# Altium PCB PCB.PcbDoc (part 4 of 6)
Units mm, origin at the board's own origin, x right, y up, seen from the top; angles counter-clockwise.
Board outline 190 x 64 mm, 6 copper layers (SIG 1, GND 1, SIG 2, PWR, GND 2, SIG 3), stack 1.565 mm thick; 489 components, 387 nets, 1828 pads, 1817 vias.
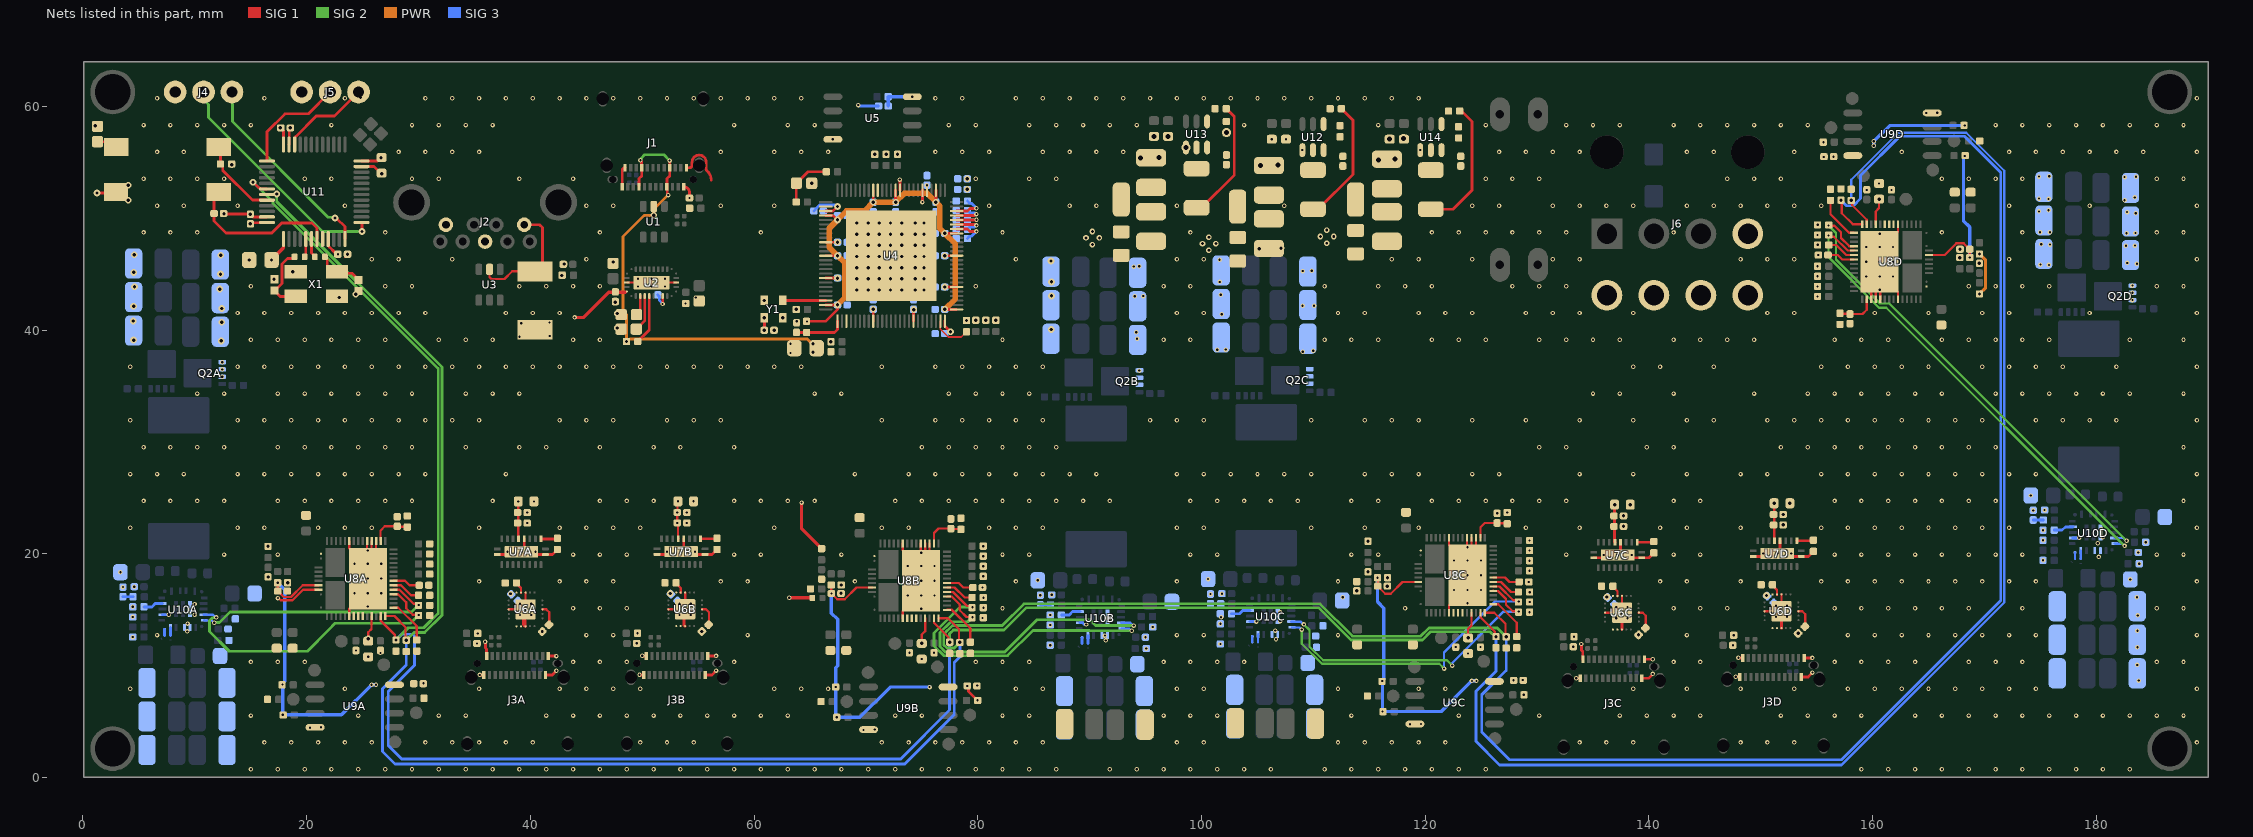
[diagram p8: the nets of this part, all layers, seen from the top]

## Via types
v1: diameter 0.4, hole 0.2, SIG 1 to SIG 3, tented both sides, 1364 vias
v2: diameter 0.6, hole 0.3, SIG 1 to SIG 3, tented both sides, 196 vias
v3: diameter 0.5, hole 0.2, SIG 1 to SIG 3, 130 vias
v4: diameter 0.8, hole 0.45, SIG 1 to SIG 3, tented both sides, 102 vias
v5: diameter 0.5, hole 0.25, SIG 1 to SIG 3, tented both sides, 14 vias
v6: diameter 0.5, hole 0.3, SIG 1 to SIG 3, tented both sides, 5 vias
v7: diameter 0.55, hole 0.3, SIG 1 to SIG 3, tented both sides, 4 vias
v8: diameter 0.55, hole 0.35, SIG 1 to SIG 3, tented both sides, 2 vias

## Nets (pads, with @x,y where several pads share a name; then routed paths per layer and width w, separated by ;. In a path a pad name is that pad's centre, name@x,y a point inside that pad or via, vN(x,y) a via of type N, cw(c..) or ccw(c..) an arc to the next point about the centre after c; other vN are vias at no path point) (continued)
GND: C1.1 C2.1 C7.1 C8.2 C9.2 C10.1 C11.1 C12.1 C13.1 C14.1 C15.1 C16.1 C17.1 C18.1 C19.2 C20.1 C21.1 C22.1 C23.1 C24.1 C25.1 C26.1 C27.1 C28.2 C29.2 C30.1 C31.2 C32A.1 C32B.1 C32C.1 C32D.1 C33A.2 C33B.2 C33C.2 C33D.2 C38A.1 C38B.1 C38C.1 C38D.1 C39A.2 C39B.2 C39C.2 C39D.2 C40A.2 C40B.2 C40C.2 C40D.2 C41A.2 C41B.2 C41C.2 C41D.2 C42A.2 C42B.2 C42C.2 C42D.2 C43A.2 C43B.2 C43C.2 C43D.2 C44A.2 C44B.2 C44C.2 C44D.2 C45A.2 C45B.2 C45C.2 C45D.2 C46A.2 C46B.2 C46C.2 C46D.2 C47A.2 C47B.2 C47C.2 C47D.2 C48A.2 C48B.2 C48C.2 C48D.2 C49A.2 C49B.2 C49C.2 C49D.2 C50A.2 C50B.2 C50C.2 C50D.2 C51A.2 C51B.2 C51C.2 C51D.2 C52A.2 C52B.2 C52C.2 C52D.2 C53A.2 C53B.2 C53C.2 C53D.2 C54A.2 C54B.2 C54C.2 C54D.2 C55A.2 C55B.2 C55C.2 C55D.2 C56A.2 C56B.2 C56C.2 C56D.2 C57A.2 C57B.2 C57C.2 C57D.2 C58A.2 C58B.2 C58C.2 C58D.2 C59A.2 C59B.2 C59C.2 C59D.2 C62A.2 C62B.2 C62C.2 C62D.2 C63A.2 C63B.2 C63C.2 C63D.2 C64A.2 C64B.2 C64C.2 C64D.2 C65A.2 C65B.2 C65C.2 C65D.2 C66A.2 C66B.2 C66C.2 C66D.2 C67A.2 C67B.2 C67C.2 C67D.2 C68A.2 C68B.2 C68C.2 C68D.2 C69A.2 C69B.2 C69C.2 C69D.2 C70A.2 C70B.2 C70C.2 C70D.2 C71A.2 C71B.2 C71C.2 C71D.2 C72A.2 C72B.2 C72C.2 C72D.2 C73.2 C74.2 C75.2 C76.2 C77.2 C78.1 C80.1 C81.1 C83.2 C84.2 C85.2 C86.2 C88.2 C89.2 C90.2 C91.2 C93.2 C94.2 C95.2 C96.2 J1.A1 J1.A12 J1.B1 J1.B12 J2.4 J2.7 J3A.A1 J3A.A12 J3A.B1 J3A.B12 J3B.A1 J3B.A12 J3B.B1 J3B.B12 J3C.A1 J3C.A12 J3C.B1 J3C.B12 J3D.A1 J3D.A12 J3D.B1 J3D.B12 J4.1 J5.1 J6.4 J6.5 J6.6 J6.7 J6.8 Q2A.1 Q2A.2 Q2A.3 Q2B.1 Q2B.2 Q2B.3 Q2C.1 Q2C.2 Q2C.3 Q2D.1 Q2D.2 Q2D.3 R3.2 R4.2 R5.2 R6.2 R7.2 R10.1 R12.1 R14.1 R16.1 R17.2 R18.1 R19.2 R22.2 R23.2 R28.2 R29.2 R32.2 R33.2 R34.2 R36A.2 R36B.2 R36C.2 R36D.2 R37A.1 R37B.1 R37C.1 R37D.1 R45A.2 R45B.2 R45C.2 R45D.2 R46A.2 R46B.2 R46C.2 R46D.2 R47A.2 R47B.2 R47C.2 R47D.2 R48A.2 R48B.2 R48C.2 R48D.2 R50A.2 R50B.2 R50C.2 R50D.2 R51A.2 R51B.2 R51C.2 R51D.2 R59A.2 R59B.2 R59C.2 R59D.2 R62A.2 R62B.2 R62C.2 R62D.2 R63A.2 R63B.2 R63C.2 R63D.2 R64A.2 R64B.2 R64C.2 R64D.2 R66A.2 R66B.2 R66C.2 R66D.2 R71.2 R74.2 R77.2 R78.1 SW2.2 U2.13 U2.28 U2.31 U4.101 U5.4 U6A.8 U6A.13 U6A.16 U6A.17 U6A.18 U6A.21 U6B.8 U6B.13 U6B.16 U6B.17 U6B.18 U6B.21 U6C.8 U6C.13 U6C.16 U6C.17 U6C.18 U6C.21 U6D.8 U6D.13 U6D.16 U6D.17 U6D.18 U6D.21 U7A.5 U7A.11 U7A.20 U7A.21 U7B.5 U7B.11 U7B.20 U7B.21 U7C.5 U7C.11 U7C.20 U7C.21 U7D.5 U7D.11 U7D.20 U7D.21 U8A.1-2 U8A.20 U8A.45 U8A.46 U8A.47 U8A.51 U8A.59 U8B.1-2 U8B.20 U8B.45 U8B.46 U8B.47 U8B.51 U8B.59 U8C.1-2 U8C.20 U8C.45 U8C.46 U8C.47 U8C.51 U8C.59 U8D.1-2 U8D.20 U8D.45 U8D.46 U8D.47 U8D.51 U8D.59 U9A.4 U9B.4 U9C.4 U9D.4 U10A.9 U10A.10 U10A.15 U10A.24 U10B.9 U10B.10 U10B.15 U10B.24 U10C.9 U10C.10 U10C.15 U10C.24 U10D.9 U10D.10 U10D.15 U10D.24 U11.8 U11.23 U11.35 U11.47 U12.4 U13.4 U14.4 X1.2 X1.4 Y1.2 | length 150.4
  SIG 1 w0.203: U8A.20@23.8,14.45 23.8,15.1 25.45,16.75 U8A.59@25.45,17.8 ; U8A.51@23.8,21.15 23.8,20.5 25.45,18.85 U8A.59@25.45,17.8 ; U8A.59@25.4,19.12 U8A.47@25.4,21.15 ; U8A.46@25.8,21.15 U8A.59@25.8,18.15 ; U8A.45@26.2,21.15 26.2,18.55 U8A.59@25.8,18.15 ; U6A.13@38.062,15.044 v3(39.572,15.044) U6A.8@39.572,16.554 ; U2.28@48.636,44.269 U2.31@50.836,44.269 U2.13@53.036,44.269 ; U6B.13@52.337,15.052 v3(53.847,15.052) U6B.8@53.847,16.563 ; U8B.20@73.3,14.25 73.3,14.9 74.95,16.55 v3(74.95,17.6) ; U8B.51@73.3,20.95 73.3,20.3 74.95,18.65 v3(74.95,17.6) ; U8B.59@74.9,18.92 U8B.47@74.9,20.95 ; U8B.46@75.3,20.95 U8B.59@75.3,17.95 ; U8B.45@75.7,20.95 75.7,18.35 U8B.59@75.3,17.95 ; U8C.20@122.15,14.75 122.15,15.4 123.8,17.05 v3(123.8,18.1) ; U8C.51@122.15,21.45 122.15,20.8 123.8,19.15 v3(123.8,18.1) ; U8C.59@123.75,19.42 U8C.47@123.75,21.45 ; U8C.46@124.15,21.45 U8C.59@124.15,18.45 ; U8C.45@124.55,21.45 124.55,18.85 U8C.59@124.15,18.45 ; U6C.13@136.092,14.749 v3(137.602,14.749) U6C.8@137.602,16.26 ; U6D.13@150.362,14.878 151.872,14.878 U6D.8@151.872,16.388 ; U8D.45@159.9,42.775 159.9,45.375 U8D.59@160.3,45.775 ; U8D.46@160.3,42.775 U8D.59@160.3,45.775 ; U8D.47@160.7,42.775 U8D.59@160.7,44.805 ; U8D.51@162.3,42.775 162.3,43.425 160.65,45.075 v3(160.65,46.125) ; U8D.20@162.3,49.475 162.3,48.825 160.65,47.175 v3(160.65,46.125) ; U8A.59@25.45,17.8 U8A.59@25.8,18.15 ; v3(74.95,17.6) U8B.59@75.3,17.95 ; v3(123.8,18.1) U8C.59@124.15,18.45 ; U8D.59@160.3,45.775 v3(160.65,46.125)
  SIG 1 w0.25: v2(1.252,52.278) 2.874,52.278 SW2.2@2.95,52.355 ; C78.1@12.578,50.443 v2(12.611,50.411) 14.936,50.411 15.208,50.139 U11.47@16.45,50.139 ; U11.35@18.425,56.614 18.435,56.624 18.435,58.011 v2(18.525,58.102) ; C73.2@23.462,46.582 23.462,46.608 v2(23.655,46.8) ; U11.23@24.9,54.639 26.031,54.639 26.622,54.049 C76.2@26.704,54.049 ; v1@35.54,9.195 35.555,9.181 35.844,9.181 J3A.B12@35.85,9.175 ; v1(35.95,12.15) 35.979,12.121 35.979,11.581 36.075,11.484 J3A.A1@36.075,10.87 ; U7A.11@37.05,19.95 38.95,19.95 v3(39.2,20.2) ; U7A.5@39.45,21.35 39.45,20.45 v3(39.2,20.2) ; U6A.18@39.55,13.6 39.55,13.975 ccw(c39.4,13.975) 39.4,14.125 39.4,13.706 ccw(c39.572,13.706) U6A.18@39.572,13.534 ; J3A.B1@41.35,9.175 41.958,9.175 v1@42.348,9.565 ; J3A.A12@41.6,10.875 v1(42.335,10.875) ; R37A.1@42.425,20.4 41.975,19.95 U7A.20@41.35,19.95 39.45,19.95 v3(39.2,20.2) ; J1.A12@48.213,52.833 48.213,54.283 cw(c48.463,54.283) J1.B1@48.463,54.533 ; v1@49.815,9.204 49.83,9.189 50.119,9.189 J3B.B12@50.125,9.183 ; v1(49.999,10.903) 50.023,10.878 J3B.A1@50.33,10.878 ; U7B.11@51.325,19.958 53.225,19.958 v3(53.475,20.208) ; J1.A1@53.713,52.833 cw(c53.713,52.315) 54.231,52.315 v1(54.231,51.833) ; U7B.5@53.725,21.358 53.725,20.458 v3(53.475,20.208) ; 53.75,14.125 53.75,13.639 ccw(c53.847,13.639) U6B.18@53.847,13.542 ; J1.B12@53.963,54.533 54.218,54.533 ccw(c54.218,54.783) 54.468,54.783 54.468,55.043 cw(c55.093,55.043) 55.718,55.043 55.718,54.441 ccw(c55.968,54.441) 55.801,54.255 cw(c55.067,53.425) 56.175,53.425 ; J3B.B1@55.625,9.183 56.233,9.183 v1@56.623,9.573 ; J3B.A12@55.875,10.883 v1(56.61,10.883) ; R37B.1@56.7,20.408 56.25,19.958 U7B.20@55.625,19.958 53.725,19.958 v3(53.475,20.208) ; v1@133.571,8.901 133.586,8.886 133.875,8.886 J3C.B12@133.88,8.88 ; v1(133.975,11.95) 134.004,11.921 134.004,11.381 134.105,11.279 J3C.A1@134.105,10.575 ; U7C.11@135.08,19.655 136.98,19.655 v3(137.23,19.905) ; U7C.5@137.48,21.055 137.48,20.155 v3(137.23,19.905) ; U6C.18@137.602,13.239 v3(137.602,14.749) ; J3C.B1@139.38,8.88 139.988,8.88 v1@140.378,9.27 ; J3C.A12@139.63,10.58 v1(140.365,10.58) ; R37C.1@140.455,20.105 140.005,19.655 U7C.20@139.38,19.655 137.48,19.655 v3(137.23,19.905) ; v1@147.84,9.029 147.855,9.014 148.144,9.014 J3D.B12@148.15,9.008 ; v1(148.024,10.728) 148.048,10.703 J3D.A1@148.355,10.703 ; U7D.11@149.35,19.783 151.25,19.783 v3(151.5,20.033) ; U7D.5@151.75,21.183 151.75,20.283 v3(151.5,20.033) ; U6D.18@151.872,13.367 v3(151.872,14.877) ; J3D.B1@153.65,9.008 154.258,9.008 v1@154.648,9.398 ; J3D.A12@153.9,10.708 v1(154.635,10.708) ; R37D.1@154.725,20.233 154.275,19.783 U7D.20@153.65,19.783 151.75,19.783 v3(151.5,20.033)
  SIG 3 w0.25: U10A.15@7.114,14.572 7.672,14.572 v1(7.675,14.575) ; v1(69.317,60.14) 69.407,60.05 C30.1@71.14,60.05 ; U10B.15@89.144,13.843 89.381,13.843 89.503,13.721 89.676,13.721 v1(89.705,13.693) ; U10C.15@104.363,13.95 104.921,13.95 v1(104.924,13.953) ; U10D.15@177.924,21.428 178.483,21.428 v1(178.485,21.43)
  other v1: 15.019,0.746 17.419,0.746 19.819,0.746 22.219,0.746 24.619,0.746 27.019,0.746 29.419,0.746 31.819,0.746 34.219,0.746 36.619,0.746 39.019,0.746 41.419,0.746 43.819,0.746 46.219,0.746 48.619,0.746 51.019,0.746 53.419,0.746 55.819,0.746 58.219,0.746 60.619,0.746 63.019,0.746 65.419,0.746 67.819,0.746 70.219,0.746 72.619,0.746 75.019,0.746 77.419,0.746 79.819,0.746 82.219,0.746 84.619,0.746 87.019,0.746 91.819,0.746 94.219,0.746 96.619,0.746 99.019,0.746 101.419,0.746 103.819,0.746 106.219,0.746 111.019,0.746 113.419,0.746 115.819,0.746 118.219,0.746 120.619,0.746 123.019,0.746 125.419,0.746 159.019,0.746 161.419,0.746 163.819,0.746 166.219,0.746 168.619,0.746 171.019,0.746 173.419,0.746 175.819,0.746 178.219,0.746 180.619,0.746 183.019,0.746 16.219,3.146 18.619,3.146 21.019,3.146 23.419,3.146 25.819,3.146 30.619,3.146 33.019,3.146 35.419,3.146 37.819,3.146 40.219,3.146 49.819,3.146 52.219,3.146 54.619,3.146 71.419,3.146 73.819,3.146 76.219,3.146 78.619,3.146 81.019,3.146 83.419,3.146 85.819,3.146 97.819,3.146 100.219,3.146 112.219,3.146 114.619,3.146 117.019,3.146 119.419,3.146 121.819,3.146 133.819,3.146 136.219,3.146 138.619,3.146 148.219,3.146 150.619,3.146 153.019,3.146 189.019,3.146 69.796,4.271 70.787,4.297 20.296,4.471 21.287,4.497 118.646,4.771 119.637,4.797 15.019,5.546 24.619,5.546 31.819,5.546 34.219,5.546 41.419,5.546 43.819,5.546 46.219,5.546 48.619,5.546 51.019,5.546 53.419,5.546 55.819,5.546 58.219,5.546 60.619,5.546 63.019,5.546 72.619,5.546 75.019,5.546 82.219,5.546 84.619,5.546 96.619,5.546 99.019,5.546 101.419,5.546 113.419,5.546 123.019,5.546 130.219,5.546 137.419,5.546 139.819,5.546 142.219,5.546 144.619,5.546 151.819,5.546 154.219,5.546 156.619,5.546 159.019,5.546 163.819,5.546 166.219,5.546 168.619,5.546 171.019,5.546 173.419,5.546 175.819,5.546 178.219,5.546 180.619,5.546 183.019,5.546 185.419,5.546 187.819,5.546 4.219,7.946 23.419,7.946 35.419,7.946 42.619,7.946 45.019,7.946 47.419,7.946 49.819,7.946 61.819,7.946 64.219,7.946 66.619,7.946 83.419,7.946 85.819,7.946 97.819,7.946 100.219,7.946 112.219,7.946 119.419,7.946 121.819,7.946 138.619,7.946 143.419,7.946 148.219,7.946 153.019,7.946 157.819,7.946 160.219,7.946 162.619,7.946 165.019,7.946 167.419,7.946 169.819,7.946 172.219,7.946 174.619,7.946 189.019,7.946 79.956,8.234 30.456,8.434 183.825,8.675 128.735,8.734 133.516,8.892 147.786,9.02 35.486,9.186 49.761,9.195 140.365,9.27 154.635,9.398 42.335,9.565 56.61,9.573 183.675,10.075 15.019,10.346 17.419,10.346 19.819,10.346 43.819,10.346 46.219,10.346 48.619,10.346 58.219,10.346 79.819,10.346 82.219,10.346 84.619,10.346 96.619,10.346 99.019,10.346 101.419,10.346 103.819,10.346 142.219,10.346 144.619,10.346 156.619,10.346 159.019,10.346 161.419,10.346 163.819,10.346 168.619,10.346 171.019,10.346 173.419,10.346 185.419,10.346 187.819,10.346 75,10.6 25.5,10.8 123.85,11.1 26.6,11.15 73.9,11.17 76.1,11.17 24.4,11.37 95.081,11.543 122.75,11.67 124.95,11.67 183.7,11.65 133.26,11.705 86.481,11.843 147.53,11.833 101.7,11.95 35.23,12 49.505,12.008 91.455,12.27 106.674,12.378 95,12.553 4.451,12.572 133.33,12.605 91.38,12.705 147.6,12.733 6.619,12.746 45.019,12.746 47.419,12.746 59.419,12.746 97.819,12.746 100.219,12.746 112.219,12.746 143.419,12.746 157.819,12.746 160.219,12.746 162.619,12.746 165.019,12.746 167.419,12.746 169.819,12.746 172.219,12.746 174.619,12.746 189.019,12.746 35.3,12.9 49.575,12.908 9.325,13.075 183.7,13.125 106.599,13.153 95.654,13.467 86.481,13.643 101.7,13.75 9.35,13.775 107.049,14.003 91.83,14.033 101.76,14.35 4.451,14.372 183.725,14.5 91.83,14.538 86.481,14.543 9.975,14.575 107.049,14.775 43.819,15.146 46.219,15.146 48.619,15.146 82.219,15.146 118.219,15.146 142.219,15.146 144.619,15.146 147.019,15.146 156.619,15.146 159.019,15.146 161.419,15.146 163.819,15.146 166.219,15.146 168.619,15.146 173.419,15.146 185.419,15.146 187.819,15.146 4.451,15.272 9.975,15.525 112.652,16.135 183.65,16.125 85.604,16.31 86.621,16.343 100.823,16.417 101.84,16.45 80.43,17 3.574,17.04 4.591,17.072 129.28,17.5 35.419,17.546 42.619,17.546 45.019,17.546 47.419,17.546 57.019,17.546 59.419,17.546 69.019,17.546 83.419,17.546 97.819,17.546 112.219,17.546 141.019,17.546 143.419,17.546 148.219,17.546 155.419,17.546 157.819,17.546 160.219,17.546 162.619,17.546 165.019,17.546 167.419,17.546 169.819,17.546 172.219,17.546 174.619,17.546 189.019,17.546 85.381,17.643 183.061,17.728 100.6,17.75 80.5,18 3.351,18.372 129.35,18.5 80.5,18.9 183.861,19.128 129.35,19.4 175.261,19.428 180.235,19.731 80.5,19.8 12.619,19.946 17.419,19.946 43.819,19.946 46.219,19.946 48.619,19.946 58.219,19.946 60.619,19.946 67.819,19.946 82.219,19.946 84.619,19.946 99.019,19.946 101.419,19.946 113.419,19.946 115.819,19.946 132.619,19.946 142.219,19.946 144.619,19.946 156.619,19.946 159.019,19.946 161.419,19.946 163.819,19.946 166.219,19.946 168.619,19.946 171.019,19.946 173.419,19.946 185.419,19.946 187.819,19.946 183.78,20.138 129.35,20.3 80.5,20.7 180.16,20.95 184.435,21.052 129.35,21.2 175.261,21.228 180.61,21.48 175.261,22.128 180.445,22.215 4.219,22.346 13.819,22.346 16.219,22.346 21.019,22.346 23.419,22.346 25.819,22.346 35.419,22.346 42.619,22.346 45.019,22.346 47.419,22.346 49.819,22.346 61.819,22.346 71.419,22.346 73.819,22.346 81.019,22.346 83.419,22.346 85.819,22.346 97.819,22.346 100.219,22.346 109.819,22.346 114.619,22.346 119.419,22.346 129.019,22.346 133.819,22.346 141.019,22.346 143.419,22.346 148.219,22.346 155.419,22.346 157.819,22.346 160.219,22.346 162.619,22.346 165.019,22.346 167.419,22.346 169.819,22.346 172.219,22.346 189.019,22.346 39.72,22.764 53.995,22.772 126.45,23.63 39.72,23.7 53.995,23.708 127.35,23.7 174.384,23.895 175.401,23.928 40.32,24.7 54.595,24.708 5.419,24.746 7.819,24.746 10.219,24.746 12.619,24.746 17.419,24.746 19.819,24.746 22.219,24.746 24.619,24.746 27.019,24.746 29.419,24.746 36.619,24.746 46.219,24.746 48.619,24.746 51.019,24.746 58.219,24.746 60.619,24.746 63.019,24.746 65.419,24.746 72.619,24.746 75.019,24.746 77.419,24.746 79.819,24.746 82.219,24.746 84.619,24.746 87.019,24.746 89.419,24.746 91.819,24.746 99.019,24.746 101.419,24.746 103.819,24.746 106.219,24.746 108.619,24.746 113.419,24.746 115.819,24.746 120.619,24.746 123.019,24.746 125.419,24.746 127.819,24.746 130.219,24.746 132.619,24.746 142.219,24.746 144.619,24.746 156.619,24.746 159.019,24.746 161.419,24.746 163.819,24.746 166.219,24.746 168.619,24.746 171.019,24.746 187.819,24.746 174.161,25.228 4.219,27.146 6.619,27.146 9.019,27.146 13.819,27.146 16.219,27.146 18.619,27.146 21.019,27.146 23.419,27.146 25.819,27.146 28.219,27.146 30.619,27.146 37.819,27.146 69.019,27.146 73.819,27.146 76.219,27.146 78.619,27.146 81.019,27.146 83.419,27.146 85.819,27.146 88.219,27.146 90.619,27.146 97.819,27.146 100.219,27.146 102.619,27.146 105.019,27.146 107.419,27.146 109.819,27.146 114.619,27.146 117.019,27.146 119.419,27.146 124.219,27.146 126.619,27.146 133.819,27.146 138.619,27.146 143.419,27.146 148.219,27.146 150.619,27.146 155.419,27.146 157.819,27.146 160.219,27.146 162.619,27.146 165.019,27.146 167.419,27.146 169.819,27.146 172.219,27.146 174.619,27.146 189.019,27.146 5.419,29.546 7.819,29.546 10.219,29.546 12.619,29.546 17.419,29.546 19.819,29.546 22.219,29.546 24.619,29.546 27.019,29.546 29.419,29.546 34.219,29.546 39.019,29.546 41.419,29.546 46.219,29.546 51.019,29.546 53.419,29.546 58.219,29.546 75.019,29.546 77.419,29.546 79.819,29.546 82.219,29.546 84.619,29.546 87.019,29.546 130.219,29.546 132.619,29.546 139.819,29.546 142.219,29.546 151.819,29.546 154.219,29.546 156.619,29.546 159.019,29.546 161.419,29.546 163.819,29.546 166.219,29.546 168.619,29.546 171.019,29.546 187.819,29.546 4.219,31.946 13.819,31.946 16.219,31.946 18.619,31.946 21.019,31.946 23.419,31.946 25.819,31.946 28.219,31.946 30.619,31.946 33.019,31.946 35.419,31.946 42.619,31.946 45.019,31.946 47.419,31.946 52.219,31.946 54.619,31.946 57.019,31.946 71.419,31.946 76.219,31.946 78.619,31.946 81.019,31.946 83.419,31.946 85.819,31.946 95.419,31.946 97.819,31.946 100.219,31.946 109.819,31.946 114.619,31.946 117.019,31.946 119.419,31.946 124.219,31.946 129.019,31.946 133.819,31.946 138.619,31.946 143.419,31.946 145.819,31.946 150.619,31.946 153.019,31.946 155.419,31.946 157.819,31.946 160.219,31.946 162.619,31.946 165.019,31.946 167.419,31.946 169.819,31.946 174.619,31.946 177.019,31.946 179.419,31.946 181.819,31.946 189.019,31.946 10.219,34.346 12.619,34.346 17.419,34.346 19.819,34.346 22.219,34.346 24.619,34.346 27.019,34.346 29.419,34.346 34.219,34.346 36.619,34.346 39.019,34.346 65.419,34.346 67.819,34.346 77.419,34.346 79.819,34.346 82.219,34.346 84.619,34.346 135.019,34.346 137.419,34.346 142.219,34.346 149.419,34.346 154.219,34.346 156.619,34.346 159.019,34.346 161.419,34.346 163.819,34.346 166.219,34.346 171.019,34.346 173.419,34.346 175.819,34.346 178.219,34.346 180.619,34.346 183.019,34.346 187.819,34.346 12.446,35.847 94.45,36.4 12.446,36.497 4.219,36.746 13.819,36.746 16.219,36.746 18.619,36.746 21.019,36.746 23.419,36.746 25.819,36.746 28.219,36.746 30.619,36.746 33.019,36.746 35.419,36.746 37.819,36.746 40.219,36.746 42.619,36.746 45.019,36.746 47.419,36.746 49.819,36.746 52.219,36.746 54.619,36.746 57.019,36.746 59.419,36.746 61.819,36.746 64.219,36.746 71.419,36.746 76.219,36.746 78.619,36.746 81.019,36.746 83.419,36.746 85.819,36.746 138.619,36.746 141.019,36.746 145.819,36.746 155.419,36.746 157.819,36.746 160.219,36.746 162.619,36.746 165.019,36.746 169.819,36.746 172.219,36.746 174.619,36.746 177.019,36.746 181.819,36.746 189.019,36.746 12.446,37.147 63.267,37.971 109.075,38.075 110,38.175 101.425,38.25 102.175,38.275 63.267,38.796 15.019,39.146 17.419,39.146 19.819,39.146 22.219,39.146 24.619,39.146 27.019,39.146 31.819,39.146 34.219,39.146 36.619,39.146 43.819,39.146 46.219,39.146 82.219,39.146 96.619,39.146 99.019,39.146 111.019,39.146 113.419,39.146 115.819,39.146 120.619,39.146 123.019,39.146 125.419,39.146 130.219,39.146 132.619,39.146 135.019,39.146 137.419,39.146 142.219,39.146 144.619,39.146 147.019,39.146 149.419,39.146 156.619,39.146 159.019,39.146 161.419,39.146 166.219,39.146 168.619,39.146 171.019,39.146 173.419,39.146 175.819,39.146 183.019,39.146 187.819,39.146 94.25,39.25 94.175,39.825 63.813,40.805 101.825,41.425 13.819,41.546 16.219,41.546 18.619,41.546 21.019,41.546 23.419,41.546 25.819,41.546 28.219,41.546 30.619,41.546 37.819,41.546 40.219,41.546 42.619,41.546 97.819,41.546 100.219,41.546 112.219,41.546 114.619,41.546 119.419,41.546 121.819,41.546 124.219,41.546 129.019,41.546 131.419,41.546 133.819,41.546 138.619,41.546 150.619,41.546 153.019,41.546 160.219,41.546 165.019,41.546 169.819,41.546 172.219,41.546 179.419,41.546 189.019,41.546 109.05,42.2 110.075,42.2 183.256,42.703 54.799,42.931 155.1,43.025 94.05,43.05 94.795,43.058 101.725,43.175 183.256,43.353 155.1,43.925 15.019,43.946 27.019,43.946 29.419,43.946 39.019,43.946 41.419,43.946 43.819,43.946 46.219,43.946 79.819,43.946 96.619,43.946 99.019,43.946 111.019,43.946 115.819,43.946 118.219,43.946 120.619,43.946 127.819,43.946 130.219,43.946 132.619,43.946 168.619,43.946 171.019,43.946 173.419,43.946 175.819,43.946 185.419,43.946 187.819,43.946 183.256,44.003 101.65,44.325 155.1,44.825 109.075,45.3 109.875,45.325 93.95,45.7 94.45,45.725 155.1,45.725 175.79,45.849 175.025,45.875 183.65,45.95 182.8,46.025 101.625,46.3 25.819,46.346 28.219,46.346 33.019,46.346 45.019,46.346 83.419,46.346 97.819,46.346 100.219,46.346 117.019,46.346 119.419,46.346 124.219,46.346 131.419,46.346 133.819,46.346 148.219,46.346 150.619,46.346 153.019,46.346 172.219,46.346 189.019,46.346 155.17,46.725 182.675,47.55 183.475,47.575 175.883,47.662 175.1,47.7 182.725,48.675 183.525,48.7 5.419,48.746 7.819,48.746 10.219,48.746 27.019,48.746 46.219,48.746 60.619,48.746 82.219,48.746 99.019,48.746 120.619,48.746 123.019,48.746 125.419,48.746 127.819,48.746 130.219,48.746 132.619,48.746 142.219,48.746 166.219,48.746 173.419,48.746 185.419,48.746 187.819,48.746 175,48.775 175.875,48.775 183.55,50.475 182.775,50.575 174.9,50.625 175.75,50.725 6.619,51.146 9.019,51.146 13.819,51.146 23.419,51.146 45.019,51.146 47.419,51.146 57.019,51.146 61.819,51.146 81.019,51.146 88.219,51.146 90.619,51.146 97.819,51.146 107.419,51.146 124.219,51.146 126.619,51.146 131.419,51.146 133.819,51.146 136.219,51.146 138.619,51.146 143.419,51.146 145.819,51.146 148.219,51.146 150.619,51.146 153.019,51.146 155.419,51.146 172.219,51.146 179.419,51.146 189.019,51.146 182.55,51.625 175.75,51.75 174.9,51.775 183.45,51.875 159.5,52.555 161.7,52.555 160.6,53.125 5.419,53.546 7.819,53.546 10.219,53.546 12.619,53.546 19.819,53.546 22.219,53.546 29.419,53.546 31.819,53.546 39.019,53.546 43.819,53.546 79.819,53.546 84.619,53.546 87.019,53.546 125.419,53.546 127.819,53.546 130.219,53.546 147.019,53.546 149.419,53.546 151.819,53.546 166.219,53.546 168.619,53.546 171.019,53.546 173.419,53.546 185.419,53.546 187.819,53.546 182.55,53.7 183.575,53.725 174.9,53.75 175.825,53.775 155.644,55.491 6.619,55.946 9.019,55.946 28.219,55.946 30.619,55.946 33.019,55.946 35.419,55.946 57.019,55.946 61.819,55.946 64.219,55.946 66.619,55.946 76.219,55.946 78.619,55.946 81.019,55.946 85.819,55.946 88.219,55.946 90.619,55.946 93.019,55.946 126.619,55.946 129.019,55.946 131.419,55.946 133.819,55.946 143.419,55.946 145.819,55.946 153.019,55.946 162.619,55.946 172.219,55.946 174.619,55.946 177.019,55.946 179.419,55.946 181.819,55.946 184.219,55.946 189.019,55.946 109.032,56.111 119.573,56.111 67.05,57.075 106.299,57.085 107.569,57.085 5.419,58.346 7.819,58.346 10.219,58.346 12.619,58.346 15.019,58.346 22.219,58.346 29.419,58.346 31.819,58.346 34.219,58.346 36.619,58.346 58.219,58.346 63.019,58.346 65.419,58.346 77.419,58.346 79.819,58.346 84.619,58.346 87.019,58.346 89.419,58.346 91.819,58.346 94.219,58.346 103.819,58.346 115.819,58.346 125.419,58.346 132.619,58.346 135.019,58.346 137.419,58.346 142.219,58.346 144.619,58.346 147.019,58.346 149.419,58.346 151.819,58.346 154.219,58.346 171.019,58.346 173.419,58.346 175.819,58.346 178.219,58.346 180.619,58.346 183.019,58.346 185.419,58.346 187.819,58.346 164.813,59.428 165.804,59.454 6.619,60.746 16.219,60.746 23.419,60.746 30.619,60.746 33.019,60.746 35.419,60.746 37.819,60.746 40.219,60.746 42.619,60.746 45.019,60.746 47.419,60.746 49.819,60.746 52.219,60.746 54.619,60.746 57.019,60.746 59.419,60.746 61.819,60.746 64.219,60.746 76.219,60.746 78.619,60.746 83.419,60.746 85.819,60.746 88.219,60.746 90.619,60.746 93.019,60.746 95.419,60.746 97.819,60.746 100.219,60.746 102.619,60.746 105.019,60.746 107.419,60.746 109.819,60.746 112.219,60.746 114.619,60.746 117.019,60.746 119.419,60.746 189.019,60.746
  other v2: 139.092,12.767 153.362,12.895 55.337,13.07 67.78,16.475 116.63,17.129 67.795,17.225 18.295,17.425 116.645,17.879 16.55,17.945 114.9,18.399 137.751,22.47 152.02,22.597 137.751,23.405 152.02,23.533 138.351,24.405 152.62,24.533 66.875,38.979 12.35,39.05 4.525,39.125 61.8,40 86.575,40.075 47.775,40.2 12.4,40.725 4.5,40.825 79,40.875 79.825,40.9 80.725,40.9 81.625,40.9 62.575,41.119 47.775,41.5 63.775,41.869 12.4,41.95 4.525,42.15 47.6,42.5 22.92,42.938 86.6,43.075 24.385,43.217 69.2,43.6 70.2,43.6 71.2,43.6 72.2,43.6 73.2,43.6 74.412,43.6 75.2,43.6 12.229,43.685 4.6,43.9 86.6,44.325 17.075,44.572 69.2,44.6 70.2,44.6 71.2,44.6 72.2,44.6 73.2,44.6 74.412,44.6 75.2,44.6 42.8,44.9 12.3,45.025 4.55,45.175 18.754,45.224 69.2,45.6 70.2,45.6 71.2,45.6 72.2,45.6 73.2,45.6 74.412,45.6 75.2,45.6 43.025,45.925 169.567,45.98 47.4,46.1 86.55,46.2 14.858,46.291 167.822,46.5 69.2,46.6 70.2,46.6 71.2,46.6 72.2,46.6 73.2,46.6 74.412,46.6 75.2,46.6 12.325,46.7 4.575,46.75 167.837,47.25 105.175,47.3 107.125,47.35 69.2,47.6 70.2,47.6 71.2,47.6 72.2,47.6 73.2,47.6 74.412,47.6 75.2,47.6 69.2,48.6 70.2,48.6 71.2,48.6 72.2,48.6 73.2,48.6 74.412,48.6 75.2,48.6 69.2,49.6 70.2,49.6 71.2,49.6 72.2,49.6 73.2,49.6 74.412,49.6 75.2,49.6 14.969,50.378 4.05,51.625 4.05,52.975 26.704,54.012 13.299,54.816
  other v3: 137.102,14.249 138.102,14.249 151.372,14.377 152.372,14.377 39.072,14.544 40.072,14.544 53.347,14.552 54.347,14.552 74.95,15.1 137.102,15.249 138.102,15.249 25.467,15.3 151.372,15.377 152.372,15.377 39.072,15.544 40.072,15.544 53.347,15.552 54.347,15.552 123.8,15.6 73.75,16.28 74.95,16.28 76.15,16.28 24.267,16.48 25.467,16.48 26.667,16.48 122.6,16.78 123.8,16.78 125,16.78 73.75,17.6 76.15,17.6 24.267,17.8 25.467,17.8 26.667,17.8 122.6,18.1 125,18.1 73.75,18.92 74.95,18.92 76.15,18.92 24.267,19.12 25.467,19.12 26.667,19.12 122.6,19.42 123.8,19.42 125,19.42 135.98,19.905 138.48,19.905 150.25,20.033 152.75,20.033 74.95,20.1 37.95,20.2 40.45,20.2 52.225,20.208 54.725,20.208 25.467,20.3 123.8,20.6 160.65,43.625 49.636,43.919 50.836,43.919 52.036,43.919 49.636,44.619 50.836,44.619 52.036,44.619 159.45,44.805 160.65,44.805 161.85,44.805 159.45,46.125 161.85,46.125 159.45,47.445 160.65,47.445 161.85,47.445 160.65,48.625
  other v4: 105.3,54.75 106.85,54.8 115.855,55.248 117.33,55.298 94.575,55.425 96.225,55.45 98.618,56.343 116.84,57.085 118.09,57.158 95.758,57.339 97.028,57.339 102.235,57.666
  other v5: 41.062,13.062
HUB_RESET_N: C31.1 R21.1 U4.1 | length 4.5
  SIG 1 w0.25: C31.1@63.8,39.815 63.808,39.808 64.693,39.808 R21.1@64.7,39.8 67.2,39.8 67.462,40.062 U4.1@67.462,40.818
I2C1_IRQA: R39A.2 U8A.29 | length 4
  SIG 1 w0.203: U8A.29@27.75,15.2 28.2,15.2 29.847,13.553 R39A.2@29.847,12.312
I2C1_IRQB: R39B.2 U8B.29 | length 4
  SIG 1 w0.203: U8B.29@77.25,15 77.7,15 79.347,13.353 R39B.2@79.347,12.112
I2C1_IRQC: R39C.2 U8C.29 | length 4
  SIG 1 w0.203: U8C.29@126.1,15.5 126.55,15.5 128.197,13.853 R39C.2@128.197,12.612
I2C1_IRQD: R39D.2 U8D.29 | length 4
  SIG 1 w0.203: R39D.2@156.253,51.613 156.253,50.372 157.9,48.725 U8D.29@158.35,48.725
I2C1_SCLA: R40A.2 R40B.2 R40C.2 R40D.2 U8A.27 U8B.27 U8C.27 U8D.27 U11.42 | length 307.6
  SIG 1 w0.203: U8A.27@26.6,14.45 26.6,14.042 27.896,12.747 27.896,12.409 v2(27.992,12.312) ; U8B.27@76.1,14.25 76.1,13.842 77.396,12.547 77.396,12.209 v2(77.492,12.112) ; U8C.27@124.95,14.75 124.95,14.342 126.246,13.047 126.246,12.709 v2(126.342,12.612) ; v6(158.108,51.613) 158.204,51.516 158.204,51.178 159.5,49.883 U8D.27@159.5,49.475
  SIG 1 w0.25: v2(15.2,53.25) 15.686,52.764 15.737,52.764 15.862,52.639 U11.42@16.45,52.639
  SIG 2 w0.25: v2(15.2,53.25) 16.99,51.46 16.99,51.354 31.76,36.584 31.76,14.688 30.472,13.4 29.081,13.4 v2(27.992,12.312) ; v2(77.492,12.112) 77.492,12.871 77.821,13.2 82.35,13.2 84.35,15.2 110.484,15.2 113.374,12.31 119.761,12.31 120.496,13.045 123.551,13.045 123.553,13.047 125.823,13.047 126.259,12.612 v2(126.342,12.612)
  SIG 3 w0.203: 157.25,1.125 171.792,15.667 171.792,54.258 168.383,57.667 162.317,57.667 158.108,53.458 v6(158.108,51.613)
  SIG 3 w0.25: v2(27.992,12.312) 28.499,12.818 29.504,12.818 29.65,12.672 29.65,10.048 27.3,7.698 27.3,2.875 28.5,1.675 73.125,1.675 77.492,6.042 v2(77.492,12.112) ; v2(126.342,12.612) 126.342,9.518 124.55,7.726 124.55,3.25 126.675,1.125 157.25,1.125
I2C1_SDAA: R41A.2 R41B.2 R41C.2 R41D.2 U8A.28 U8B.28 U8C.28 U8D.28 U11.43 | length 310.1
  SIG 1 w0.203: U8A.28@27,14.45 U8A.28@27.017,14.45 27.843,14.45 28.836,13.458 28.836,12.364 v2(28.907,12.293) ; U8B.28@76.5,14.25 77.343,14.25 78.336,13.258 78.336,12.164 v2(78.407,12.093) ; U8C.28@125.35,14.75 126.193,14.75 127.186,13.758 127.186,12.664 v2(127.257,12.593) ; R41D.2@157.193,51.632 157.264,51.561 157.264,50.467 158.257,49.475 U8D.28@159.1,49.475
  SIG 1 w0.25: U11.43@16.45,52.139 16.46,52.149 17.298,52.149 v2(17.33,52.181)
  SIG 2 w0.25: v2(17.33,52.181) 17.33,51.495 32.1,36.725 32.1,14.525 30.55,12.975 29.589,12.975 v2(28.907,12.293) ; v2(78.407,12.093) 77.901,11.587 77.246,11.587 76.967,11.865 76.967,12.827 77.741,13.6 82.2,13.6 84.14,15.54 110.625,15.54 113.515,12.65 119.62,12.65 120.357,13.387 126.463,13.387 v2(127.257,12.593)
  SIG 3 w0.25: v2(28.907,12.293) 28.907,10.082 26.775,7.95 26.775,2.35 27.9,1.225 73.475,1.225 77.9,5.65 77.9,10.302 78.407,10.808 v2(78.407,12.093) ; v2(127.257,12.593) 127.257,9.59 125.075,7.408 125.075,4.074 127.549,1.6 157.25,1.6 171.475,15.825 171.475,54.125 168.25,57.35 162.448,57.35 158.95,53.852 158.95,51.784 158.304,51.138 157.694,51.138 v6(157.193,51.639)
I2C2_IRQA: R42A.2 U8A.34 | length 2.6
  SIG 1 w0.203: U8A.34@27.75,17.2 28.437,17.2 29.337,16.3 R42A.2@30,16.3
I2C2_IRQB: R42B.2 U8B.34 | length 2.6
  SIG 1 w0.203: U8B.34@77.25,17 77.937,17 78.837,16.1 R42B.2@79.5,16.1
I2C2_IRQC: R42C.2 U8C.34 | length 2.6
  SIG 1 w0.203: U8C.34@126.1,17.5 126.787,17.5 127.687,16.6 R42C.2@128.35,16.6
I2C2_IRQD: R42D.2 U8D.34 | length 2.6
  SIG 1 w0.203: R42D.2@156.1,47.625 156.763,47.625 157.663,46.725 U8D.34@158.35,46.725
I2C2_SCLA: R43A.2 U8A.32 U10A.5 | length 27.1
  SIG 1 w0.203: U8A.32@27.75,16.4 27.752,16.398 28.172,16.398 28.9,15.671 28.9,15.156 29.489,14.567 29.933,14.567 R43A.2@30,14.5
  SIG 2 w0.25: v1(11.919,14.325) 11.89,14.296 11.572,14.296 11.311,14.035 11.311,13.064 13.075,11.3 20.059,11.3 21.95,13.191 21.95,13.209 22.541,13.8 29.28,13.8 v1(30.025,14.545)
  SIG 3 w0.203: U10A.5@10.789,14.572 11.618,14.572 11.865,14.325 v1(11.919,14.325)
I2C2_SCLB: R43B.2 U8B.32 U10B.5 | length 28.2
  SIG 1 w0.203: U8B.32@77.25,16.2 77.252,16.198 77.672,16.198 78.4,15.471 78.4,14.956 78.989,14.367 79.433,14.367 R43B.2@79.5,14.3
  SIG 2 w0.25: v1(79.525,14.345) 79.521,14.345 79.116,13.94 77.6,13.94 76.627,12.968 76.627,11.724 77.105,11.247 82.422,11.247 85.293,14.118 90.033,14.118 90.543,13.608 93.936,13.608 v1(93.949,13.595)
  SIG 3 w0.203: U10B.5@92.819,13.843 93.648,13.843 93.895,13.595 v1(93.949,13.595)
I2C2_SCLC: R43C.2 U8C.32 U10C.5 | length 28.3
  SIG 1 w0.203: U8C.32@126.1,16.7 126.102,16.698 126.522,16.698 127.25,15.971 127.25,15.456 127.839,14.867 128.283,14.867 R43C.2@128.35,14.8
  SIG 2 w0.2: v1(109.167,13.703) 109.669,13.201 109.669,11.713 110.89,10.492 113.183,10.492 121.958,10.492 v1(122.425,10.025)
  SIG 3 w0.203: U10C.5@108.038,13.95 108.867,13.95 109.114,13.703 v1(109.167,13.703) ; v1(122.425,10.025) 122.425,10.243 127.027,14.845 v1(128.375,14.845)
I2C2_SCLD: R43D.2 U8D.32 U10D.5 | length 44.3
  SIG 1 w0.203: R43D.2@156.1,49.425 156.167,49.358 156.611,49.358 157.2,48.769 157.2,48.254 157.928,47.527 158.348,47.527 U8D.32@158.35,47.525
  SIG 2 w0.203: v1(156.075,49.38) 156.75,48.706 156.75,46.325 160.675,42.4 161.509,42.4 v1(182.729,21.18)
  SIG 3 w0.203: U10D.5@181.599,21.428 182.428,21.428 182.676,21.18 v1(182.729,21.18)
I2C2_SDAA: R44A.2 U8A.33 U10A.6 | length 22.7
  SIG 1 w0.203: U8A.33@27.75,16.8 27.752,16.798 28.302,16.798 29.546,15.554 29.846,15.554 R44A.2@30,15.4
  SIG 2 w0.25: v1(11.736,13.859) 12.194,13.859 13.135,14.8 29.38,14.8 v1(30.025,15.445)
  SIG 3 w0.203: U10A.6@10.851,14.072 10.875,14.049 11.519,14.049 11.709,13.859 v1(11.736,13.859)
I2C2_SDAB: R44B.2 U8B.33 U10B.6 | length 28.3
  SIG 1 w0.203: U8B.33@77.25,16.6 77.252,16.598 77.802,16.598 79.046,15.354 79.346,15.354 R44B.2@79.5,15.2
  SIG 2 w0.25: v1(79.525,15.245) 78.423,15.245 76.1,12.921 76.1,11.771 76.964,10.907 82.682,10.907 84.943,13.168 89.996,13.168 90.034,13.13 v1(93.766,13.13)
  SIG 3 w0.203: U10B.6@92.881,13.343 92.904,13.32 93.549,13.32 93.739,13.13 v1(93.766,13.13)
I2C2_SDAC: R44C.2 U8C.33 U10C.6 | length 28.7
  SIG 1 w0.203: U8C.33@126.1,17.1 U8C.33@126.1,17.1 126.652,17.098 127.896,15.854 128.196,15.854 R44C.2@128.35,15.7
  SIG 2 w0.203: v1(108.985,13.237) 108.985,11.982 110.792,10.175 121.275,10.175 v1(121.7,9.75)
  SIG 3 w0.203: U10C.6@108.1,13.45 108.123,13.427 108.768,13.427 108.957,13.237 v1(108.985,13.237) ; v1(121.7,9.75) 121.7,11.188 126.257,15.745 v1(128.375,15.745)
I2C2_SDAD: R44D.2 U8D.33 U10D.6 | length 42.9
  SIG 1 w0.203: R44D.2@156.1,48.525 156.11,48.515 156.254,48.371 156.554,48.371 157.798,47.127 158.348,47.127 U8D.33@158.35,47.125
  SIG 2 w0.2: v1(156.075,48.48) 156.075,46.552 160.602,42.025 161.236,42.025 v1(182.547,20.715)
  SIG 3 w0.203: U10D.6@181.661,20.928 181.685,20.905 182.329,20.905 182.519,20.715 v1(182.547,20.715)
I2C3_IRQA: U8A.23
I2C3_IRQB: U8B.23
I2C3_IRQC: U8C.23
I2C3_IRQD: U8D.23
I2C3_SCLA: U8A.21
I2C3_SCLB: U8B.21
I2C3_SCLC: U8C.21
I2C3_SCLD: U8D.21
I2C3_SDAA: U8A.22
I2C3_SDAB: U8B.22
I2C3_SDAC: U8C.22
I2C3_SDAD: U8D.22
I2S_LRCK: R28.1 U4.47 | length 2.5
  SIG 1 w0.25: U4.47@78.113,50.269 79.723,50.269 79.843,50.389 v1(79.884,50.389)
  SIG 3 w0.25: R28.1@79.087,50.719 79.287,50.519 79.713,50.519
I2S_MCLK: R29.1 U4.48 | length 2.9
  SIG 1 w0.25: U4.48@78.113,50.669 79.093,50.669 79.318,50.894 79.855,50.894 v1(79.884,50.922)
  SIG 3 w0.25: R29.1@79.087,51.557 79.287,51.357 79.449,51.357 v1(79.884,50.922)
I2S_SCK: R23.1 U4.46 | length 2.6
  SIG 1 w0.25: U4.46@78.113,49.869 78.118,49.874 79.888,49.874 v1(79.893,49.879)
  SIG 3 w0.25: R23.1@79.087,49.881 v1(79.893,49.879)
I2S_SDI: R19.1 U4.44 | length 2.9
  SIG 1 w0.25: U4.44@78.113,49.069 79.093,49.069 79.317,48.845 79.887,48.845 v1(79.892,48.84)
  SIG 3 w0.25: R19.1@79.087,48.205 79.287,48.405 79.457,48.405 v1(79.892,48.84)
I2S_SDO: R22.1 U4.45 | length 2.8
  SIG 1 w0.25: U4.45@78.113,49.469 79.756,49.469 79.852,49.373 v1(79.892,49.373)
  SIG 3 w0.25: R22.1@79.087,49.043 79.287,49.243 79.722,49.243 79.852,49.373 v1(79.892,49.373)
ILIMA: R63A.1 U10A.17 | length 1.8
  SIG 3 w0.254: R63A.1@5.451,15.272 6.157,15.272 6.455,15.57 7.112,15.57 U10A.17@7.114,15.572
ILIMB: R63B.1 U10B.17 | length 1.8
  SIG 3 w0.254: R63B.1@87.481,14.543 88.187,14.543 88.485,14.841 89.142,14.841 U10B.17@89.144,14.843
ILIMC: R63C.1 U10C.17 | length 1.8
  SIG 3 w0.254: R63C.1@102.7,14.65 103.406,14.65 103.704,14.948 104.361,14.948 U10C.17@104.363,14.95
ILIMD: R63D.1 U10D.17 | length 1.8
  SIG 3 w0.254: R63D.1@176.261,22.128 176.967,22.128 177.265,22.426 177.922,22.426 U10D.17@177.924,22.428
ISA_N: NT1A.1 U10A.13 | length 0.6
  SIG 3 w0.203: U10A.13@7.3,13.26 U10A.13@7.308,13.267
  SIG 3 w0.25: NT1A.1@7.3,12.712 U10A.13@7.3,13.26
ISA_P: NT2A.1 U10A.12 | length 0.7
  SIG 3 w0.203: U10A.12@7.826,13.435 U10A.12@7.826,13.435
  SIG 3 w0.25: NT2A.1@7.825,12.712 U10A.12@7.826,13.435
ISB_N: NT1B.1 U10B.13 | length 0.6
  SIG 3 w0.254: NT1B.1@89.33,11.983 89.33,12.021 89.337,12.027 U10B.13@89.337,12.538 U10B.13@89.337,12.538
ISB_P: NT2B.1 U10B.12 | length 0.7
  SIG 3 w0.203: U10B.12@89.854,12.703 U10B.12@89.856,12.705
  SIG 3 w0.25: NT2B.1@89.854,11.983 U10B.12@89.854,12.703
ISC_N: NT1C.1 U10C.13 | length 0.6
  SIG 3 w0.203: NT1C.1@104.549,12.09 104.549,12.637 U10C.13@104.556,12.645
ISC_P: NT2C.1 U10C.12 | length 0.7
  SIG 3 w0.203: NT2C.1@105.073,12.09 105.073,12.811 U10C.12@105.075,12.812
ISD_N: NT1D.1 U10D.13 | length 0.6
  SIG 3 w0.203: NT1D.1@178.11,19.568 178.11,20.115 U10D.13@178.118,20.123
ISD_P: NT2D.1 U10D.12 | length 0.7
  SIG 3 w0.203: NT2D.1@178.635,19.568 178.635,19.671 178.636,19.673 U10D.12@178.636,20.29
LDO_1V8A: C44A.1 U8A.35 | length 2.5
  SIG 1 w0.203: U8A.35@27.75,17.6 28.8,17.6 29.2,17.2 C44A.1@30.07,17.2
LDO_1V8B: C44B.1 U8B.35 | length 2.5
  SIG 1 w0.203: U8B.35@77.25,17.4 78.3,17.4 78.7,17 C44B.1@79.57,17
LDO_1V8C: C44C.1 U8C.35 | length 2.5
  SIG 1 w0.203: U8C.35@126.1,17.9 127.15,17.9 127.55,17.5 C44C.1@128.42,17.5
LDO_1V8D: C44D.1 U8D.35 | length 2.5
  SIG 1 w0.203: C44D.1@156.03,46.725 156.9,46.725 157.3,46.325 U8D.35@158.35,46.325
LDO_3V3A: C42A.1 C52A.1 R39A.1 R40A.1 R41A.1 R42A.1 R43A.1 R44A.1 R49A.1 R52A.1 R53A.1 R54A.1 R55A.1 U8A.9 U9A.8 | length 26.8
  SIG 1 w0.203: v1(17.405,17.425) 17.405,16.699 17.95,16.153 18.61,16.153 19.656,17.2 U8A.9@21.067,17.2 ; U9A.8@27.85,8.305 U9A.8@27.898,8.353 ; C52A.1@29.522,8.353 C52A.1@29.57,8.4
  SIG 3 w0.3: v1(17.405,17.425) 18.05,16.78 18.05,8.603 17.832,8.385 v1(17.832,8.332) 17.852,8.313 17.852,8.242 17.858,8.236 v1(17.858,5.614) 23.114,5.614 v1(25.8,8.3) v1(26.2,8.3)
LDO_3V3B: C42B.1 C52B.1 R39B.1 R40B.1 R41B.1 R42B.1 R43B.1 R44B.1 R49B.1 R52B.1 R53B.1 R54B.1 R55B.1 U8B.9 U9B.8 | length 27.7
  SIG 1 w0.203: C42B.1@66.905,16.499 R49B.1@66.905,17.225 ; C42B.1@66.924,16.479 67.45,15.953 68.11,15.953 69.156,17 U8B.9@70.567,17 ; U9B.8@77.35,8.105 U9B.8@77.398,8.152
  SIG 1 w0.25: C52B.1@79.022,8.152 v1(79.07,8.2) ; C52B.1@79.079,8.2 v1(79.07,8.2) ; v1(79.982,6.913) 79.178,7.717 79.178,8.092 v1(79.07,8.2)
  SIG 3 w0.3: v1(66.92,16.475) 66.92,14.714 67.475,14.159 67.475,10.017 67.3,9.842 v1(67.3,8.1) 67.3,5.527 67.4,5.427 v1(67.4,5.4) 69.475,5.4 72.175,8.1 v1(75.7,8.1)
  other v1: 80.425,14.279 80.515,15.193 80.515,16.082
LDO_3V3C: C42C.1 C52C.1 R39C.1 R40C.1 R41C.1 R42C.1 R43C.1 R44C.1 R49C.1 R52C.1 R53C.1 R54C.1 R55C.1 U8C.9 U9C.8 | length 26.9
  SIG 1 w0.203: v1(115.755,17.879) 115.762,17.872 115.762,17.023 115.864,17.023 116.434,16.453 116.943,16.453 117.989,17.5 U8C.9@119.4,17.5 ; U9C.8@126.2,8.605 U9C.8@126.247,8.652 ; C52C.1@127.872,8.652 v1(127.92,8.7)
  SIG 3 w0.3: v1(115.755,17.879) 115.755,15.705 116.308,15.152 v1@116.308,8.784 ; v1(116.182,8.632) 116.195,8.619 116.195,5.927 v1(116.208,5.914) 121.464,5.914 v1(124.197,8.647) v1(124.597,8.647)
  other v1: 128.832,7.413 129.34,14.779 129.365,15.693 129.365,16.582
LDO_3V3D: C42D.1 C52D.1 R39D.1 R40D.1 R41D.1 R42D.1 R43D.1 R44D.1 R49D.1 R52D.1 R53D.1 R54D.1 R55D.1 U8D.9 U9D.8 | length 23.7
  SIG 1 w0.203: v1(156.53,55.525) C52D.1@156.578,55.573 ; U9D.8@158.203,55.573 U9D.8@158.25,55.62 ; U8D.9@165.05,46.725 166.461,46.725 167.507,47.772 168.167,47.772 168.712,47.226 v1(168.712,46.5)
  SIG 3 w0.3: v1(160.125,56.5) v1(160.125,56.9) 161.536,58.311 v1@168.242,58.311 ; v1(168.268,55.593) 168.268,55.566 168.142,55.441 168.142,49.806 168.712,49.236 v1(168.712,46.5)
  other v1: 155.125,47.643 155.1,48.532 155.11,49.446 155.618,56.812 168.259,58.311
M_I2C_CLK: U4.61 | length 1
  SIG 1 w0.25: v1(73.037,53.479) 73.05,53.467 73.05,52.533 U4.61@73.062,52.52
M_I2C_DATA: U4.3
MIC_DET: U4.66
NetC32A_2: C32A.2 U6A.3 | length 1.8
  SIG 1 w0.203: U6A.3@41.082,15.044 41.432,15.045 41.697,14.78 41.697,13.697 C32A.2@41.67,13.67
NetC32B_2: C32B.2 U6B.3 | length 1.8
  SIG 1 w0.203: U6B.3@55.357,15.052 55.707,15.053 55.972,14.788 55.972,13.705 C32B.2@55.945,13.678
NetC32C_2: C32C.2 U6C.3 | length 1.8
  SIG 1 w0.203: U6C.3@139.113,14.749 139.462,14.75 139.727,14.485 139.727,13.402 C32C.2@139.701,13.375
NetC32D_2: C32D.2 U6D.3 | length 1.8
  SIG 1 w0.203: U6D.3@153.382,14.878 153.732,14.878 153.997,14.613 153.997,13.53 C32D.2@153.97,13.503
NetC72A_1: C72A.1 R65A.2 | length 0.9
  SIG 3 w0.254: C72A.1@3.574,16.18 3.578,16.176 4.476,16.176 R65A.2@4.48,16.172
NetC72B_1: C72B.1 R65B.2 | length 0.9
  SIG 3 w0.254: C72B.1@85.604,15.45 85.608,15.446 86.506,15.446 R65B.2@86.51,15.443
NetC72C_1: C72C.1 R65C.2 | length 0.9
  SIG 3 w0.254: C72C.1@100.823,15.557 100.826,15.554 101.725,15.554 R65C.2@101.728,15.55
NetC72D_1: C72D.1 R65D.2 | length 0.9
  SIG 3 w0.254: C72D.1@174.384,23.035 174.388,23.031 175.286,23.031 R65D.2@175.29,23.028
NetC78_2: C78.2 SW2.1 U11.7 | length 13.9
  SIG 1 w0.25: SW2.1@12.14,52.355 11.718,51.933 11.718,49.782 12.795,48.705 16.876,48.705 17.77,49.599 20.475,49.599 20.925,49.148 U11.7@20.925,48.164
NetC80_2: C80.2 R67.1 X1.1 | length 6.2
  SIG 1 w0.25: R67.1@18.914,46.57 18.914,46.551 18.789,46.426 18.289,46.426 17.787,45.925 17.787,44.186 17.382,43.78 17.363,43.78 C80.2@17.128,43.545 17.642,43.032 X1.1@19.012,43.032
NetC81_2: C81.2 R68.1 X1.3 | length 4.3
  SIG 1 w0.25: R68.1@21.635,46.57 21.635,46.545 21.837,46.343 21.837,45.707 22.312,45.232 X1.3@22.712,45.232 22.841,45.103 24.058,45.103 C81.2@24.647,44.515
NetC82_1: C82.1 L2.1 U12.5
NetC82_2: C82.2 U12.6
NetC85_1: C85.1 C86.1 L2.2 R69.1 R70.1 TP7.0 | length 11.2
  SIG 1 w0.25: L2.2@109.982,50.828 110.432,50.828 113.55,53.946 113.55,58.781 R70.1@112.514,59.817
NetC87_1: C87.1 L3.1 U13.5
NetC87_2: C87.2 U13.6
NetC90_1: C90.1 C91.1 L3.2 R72.1 R73.1 TP8.0 | length 10.8
  SIG 1 w0.25: L3.2@99.568,50.955 100.018,50.955 102.95,53.887 102.95,59.094 R73.1@102.227,59.817
NetC92_1: C92.1 L4.1 U14.5
NetC92_2: C92.2 U14.6
NetC95_1: C95.1 C96.1 L4.2 R75.1 R76.1 TP9.0 | length 12
  SIG 1 w0.25: L4.2@120.523,50.828 122.503,50.828 124.2,52.525 124.2,58.672 R76.1@123.182,59.69
NetF2_1: F2.1 J2.1 U3.5 | length 11
  SIG 1 w0.203: U3.5@36.35,45.45 36.35,44.75 36.516,44.584 37.684,44.584 38.375,45.275 F2.1@40.425,45.275
  SIG 1 w0.25: J2.1@39.45,49.435 40.815,49.435 41.075,49.175 41.075,45.925 F2.1@40.425,45.275
NetJ4_2: J4.2 U11.13 | length 21.1
  SIG 1 w0.25: U11.13@24.9,49.639 24.929,49.639 24.952,49.616 v2(24.952,48.831)
  SIG 2 w0.25: J4.2@10.782,61.129 10.782,60.647 11.228,60.201 11.228,59.027 21.424,48.831 v2(24.952,48.831)
NetJ4_3: J4.3 U11.12 | length 17.5
  SIG 1 w0.25: v2(22.53,50.035) 22.597,49.968 22.721,49.968 23.425,49.264 U11.12@23.425,48.164
  SIG 2 w0.25: J4.3@13.322,61.129 13.357,61.094 13.357,58.68 21.935,50.102 22.463,50.102 v2(22.53,50.035)
NetJ5_2: J5.2 U11.37 | length 9.7
  SIG 1 w0.25: U11.37@16.45,55.139 16.45,57.747 18.059,59.356 20.147,59.356 J5.2@22.097,61.306
NetJ5_3: J5.3 U11.34 | length 8.5
  SIG 1 w0.25: U11.34@18.925,56.614 18.925,57.202 19.05,57.327 19.05,57.344 20.861,59.155 22.485,59.155 24.148,60.818 v2(24.816,60.818)
  SIG 2 w0.25: J5.3@24.637,61.306 24.637,60.998 v2(24.816,60.818)
NetR2_2: R2.2 U2.5 | length 4.5
  SIG 1 w0.25: R2.2@49.6,39 50.636,40.036 U2.5@50.636,43.069
NetR3_1: R3.1 U2.3 | length 1.8
  SIG 1 w0.25: R3.1@49.5,41.4 49.836,41.736 U2.3@49.836,43.069
NetR4_1: R4.1 U2.4 | length 3.3
  SIG 1 w0.25: R4.1@49.47,40.1 50.236,40.866 U2.4@50.236,43.069
NetR8_1: R8.1 SW1.1 | length 1.9
  SIG 1 w0.25: R8.1@1.291,56.856 R8.1@1.3,56.865 2.529,56.865 SW1.1@3.022,56.372
NetR18_2: R18.2 U4.24 | length 3.5
  SIG 1 w0.15: U4.24@76.662,40.818 76.662,40.116 77.378,39.4 78.525,39.4 R18.2@79,39.875
NetR27_2: R27.2 R30.2 R31.2 | length 4.8
  SIG 1 w0.25: R30.2@63.775,51.469 63.783,51.477 63.783,53.142 R31.2@63.79,53.15 64.815,54.175 R27.2@66.462,54.175
NetR35A_2: R35A.2 U6A.9 | length 1
  SIG 1 w0.2: R35A.2@38.759,17.363 39.172,16.949 U6A.9@39.172,16.523
NetR35B_2: R35B.2 U6B.9 | length 1
  SIG 1 w0.2: R35B.2@53.034,17.371 53.447,16.958 U6B.9@53.447,16.531
NetR35C_2: R35C.2 U6C.9 | length 1
  SIG 1 w0.2: R35C.2@136.789,17.068 137.202,16.655 U6C.9@137.202,16.229
NetR35D_2: R35D.2 U6D.9 | length 1
  SIG 1 w0.2: R35D.2@151.059,17.196 151.472,16.783 U6D.9@151.472,16.356
NetR67_2: R67.2 U11.5 | length 1.6
  SIG 1 w0.25: R67.2@19.814,46.57 19.916,46.672 19.916,48.154 U11.5@19.925,48.164
NetR68_2: R68.2 U11.6 | length 1.7
  SIG 1 w0.25: U11.6@20.425,48.164 20.425,46.905 20.735,46.595 R68.2@20.735,46.57
NetR70_2: R70.2 R71.1 U12.1
NetR73_2: R73.2 R74.1 U13.1
NetR76_2: R76.2 R77.1 U14.1
NetR78_2: R78.2 SW1.2 U11.44 | length 7.2
  SIG 1 w0.25: SW1.2@12.212,56.372 12.291,56.293 R78.2@12.291,54.866 12.491,54.666 12.491,54.309 15.161,51.639 U11.44@16.45,51.639
NetU4_56: U4.56 | length 1.1
  SIG 1 w0.25: v1(75.062,51.461) U4.56@75.062,52.52
NetU4_77: U4.77
OEA: R37A.2 U7A.2 | length 1.5
  SIG 1 w0.25: U7A.2@40.95,21.35 42.375,21.35 R37A.2@42.425,21.4
OEB: R37B.2 U7B.2 | length 1.5
  SIG 1 w0.25: U7B.2@55.225,21.358 56.65,21.358 R37B.2@56.7,21.408
OEC: R37C.2 U7C.2 | length 1.5
  SIG 1 w0.25: U7C.2@138.98,21.055 140.406,21.055 R37C.2@140.455,21.105
OED: R37D.2 U7D.2 | length 1.5
  SIG 1 w0.25: U7D.2@153.25,21.183 154.675,21.183 R37D.2@154.725,21.233
OSC25: U4.98 Y1.3 | length 3.8
  SIG 1 w0.25: Y1.3@62.575,42.669 U4.98@66.411,42.669
P1V1: C9.1 C10.2 C11.2 C12.2 C13.2 C14.2 C15.2 C16.2 C17.2 C18.2 R75.2 U4.9 U4.18 U4.25 U4.31 U4.38 U4.55 U4.78 U4.85 U4.93 | length 11.1
  SIG 1 w0.25: U4.93@66.411,44.669 v2(67.47,44.669) ; U4.85@66.411,47.869 v2(67.47,47.869) ; U4.78@66.411,50.669 67.07,50.669 v2(67.47,51.069) ; U4.9@70.662,40.818 v2(70.662,41.877) ; U4.18@74.262,40.818 74.269,40.824 74.269,41.844 v2(74.275,41.85) ; v2(77.054,43.869) U4.31@78.113,43.869 ; v2(77.054,46.669) U4.38@78.113,46.669 ; U4.25@77.062,40.818 77.062,40.367 77.554,39.875 v2(77.575,39.875)
  SIG 3 w0.25: C16.2@65.353,50.669 65.647,50.963 65.647,50.988 65.872,51.214 67.23,51.214 67.375,51.069 v2(67.47,51.069)
  other v1: 75.462,52.979
  other v2: 79.062,52.6
  other v5: 111.216,47.785 110.641,48.385 111.841,48.385 111.216,48.96
P3V3: C1.2 C20.2 C21.2 C22.2 C23.2 C24.2 C25.2 C26.2 C27.2 C28.1 C29.1 C30.2 C33A.1 C33B.1 C33C.1 C33D.1 C39A.1 C39B.1 C39C.1 C39D.1 C40A.1 C40B.1 C40C.1 C40D.1 C41A.1 C41B.1 C41C.1 C41D.1 C73.1 C74.1 C75.1 C76.1 C77.1 R1.2 R8.2 R9.2 R11.2 R13.2 R20.2 R21.2 R24.2 R25.2 R26.2 R31.1 R35A.1 R35B.1 R35C.1 R35D.1 R38A.1 R38B.1 R38C.1 R38D.1 R72.2 U2.8 U4.26 U4.43 U4.53 U4.62 U4.67 U4.79 U4.88 U4.99 U5.8 U6A.10 U6B.10 U6C.10 U6D.10 U7A.6 U7B.6 U7C.6 U7D.6 U8A.10 U11.1 U11.9 U11.24 U11.36 U11.48 Y1.1 Y1.4 | length 85.4
  SIG 1 w0.2: v1(17.425,16.055) 17.479,16.055 17.672,15.862 18.731,15.862 19.669,16.8 U8A.10@21.067,16.8
  SIG 1 w0.203: v2(14.969,49.518) 15.072,49.62 16.432,49.62 U11.48@16.45,49.639 ; v1(53.195,24.708) 53.165,24.678 53.165,23.738 v1(53.135,23.708) v1(53.135,22.772) 53.202,22.706 53.202,21.382 U7B.6@53.225,21.358
  SIG 1 w0.25: v2(17.627,58.099) 17.693,58.099 17.925,57.866 U11.36@17.925,56.614 ; U11.9@21.925,48.164 21.925,47.575 22.05,47.45 22.05,47.434 22.511,46.973 22.622,46.973 v1(22.795,46.8) ; U11.24@24.9,55.139 26.304,55.139 26.608,55.444 v2(26.651,55.444) ; v1(38.92,24.7) 38.92,21.38 ccw(c38.95,21.38) U7A.6@38.95,21.35 ; v1(51.825,42.35) 51.836,42.361 U2.8@51.836,43.069 ; C29.1@60.925,40 v2(60.925,41.119) ; R21.2@64.7,40.8 66.4,40.8 67.47,41.87 v2(67.47,42.269) U4.99@66.411,42.269 ; U4.88@66.411,46.669 v2(67.47,46.669) ; U4.79@66.411,50.269 67.07,50.269 v2(67.47,49.869) ; v2(70.662,51.461) U4.67@70.662,52.52 ; v2(72.662,51.461) U4.62@72.662,52.52 ; v2(76.262,51.461) U4.53@76.262,52.52 ; v2(77.054,41.869) U4.26@78.113,41.869 ; v2(77.054,48.669) U4.43@78.113,48.669 ; v2(136.951,24.405) 136.951,21.085 ccw(c136.98,21.085) U7C.6@136.98,21.055 ; v2(151.22,24.533) 151.22,21.213 ccw(c151.25,21.213) U7D.6@151.25,21.183
  SIG 1 w0.3: v1(63.15,16.075) R9.2@65.22,16.075 ; v1(64.25,24.6) 64.25,22.27 R38B.1@66.045,20.475
  SIG 1 w0.305: v2(16.858,46.291) 17.925,47.358 U11.1@17.925,48.164
  SIG 1 w0.5: v2(60.925,39.992) C29.1@60.925,40
  PWR w0.3: v2(169.572,43.25) 170.117,43.795 170.117,46.283 v2(169.575,46.825)
  PWR w0.5: v2(67.47,42.269) 68.125,42.924 68.125,46.014 v2(67.47,46.669) 66.725,47.414 66.725,49.124 68.266,50.665 69.866,50.665 v2(70.662,51.461) v2(72.662,51.461) 73.451,52.25 75.473,52.25 v2(76.262,51.461) 76.625,51.098 76.625,49.098 v2(77.054,48.669) 78,47.723 78,42.815 v2(77.054,41.869)
  SIG 3 w0.25: C1.2@51.4,43.17 51.521,43.049 51.521,42.694 51.825,42.391 v1(51.825,42.35)
  SIG 3 w0.3: C30.2@71.993,60.05 71.993,60.892 R20.2@72,60.885 v1(74.15,60.885)
  other v1: 64.736,40.795 53.876,42.394
  other v2: 136.264,16.156 150.533,16.284 52.508,16.459 113.895,16.7 16.545,20.675 114.895,21.129 60.925,42.669 65.16,53.15 79.062,53.546 70.794,55.732 71.81,55.732 72.826,55.732 1.105,58.274
  other v5: 38.233,16.451 90.261,47.658 89.686,48.258 90.886,48.258 90.261,48.833
P5V0: C2.2 C45A.1 C45B.1 C45C.1 C45D.1 F2.2 R69.2 U2.30 U8A.25 U8B.25 U8C.25 U8D.25 | length 15
  SIG 1 w0.203: C45A.1@25.5,12.2 v2(25.5,12.425) 25.5,13 25.8,13.3 U8A.25@25.8,14.45 ; C45B.1@75,12 75,12.8 75.3,13.1 U8B.25@75.3,14.25 ; C45C.1@123.85,12.5 123.85,13.3 124.15,13.6 U8C.25@124.15,14.75 ; U8D.25@160.3,49.475 160.3,50.625 160.6,50.925 C45D.1@160.6,51.725
  SIG 1 w0.3: v1(43.95,41.15) 44.775,41.15 47.026,43.401 47.571,43.401 C2.2@47.6,43.43 47.63,43.4 48.5,43.4
  other v1: 39.03,39.429 41.73,39.479 39.18,40.629 41.705,40.704
  other v2: 74.999,12.022 123.849,12.522 160.601,51.703
  other v5: 100.675,47.15 100.1,47.75 101.3,47.75 100.675,48.325
P5V0_UFP: C19.1 J1.A4 J1.A9 J1.B4 J1.B9 R2.1 R15.1 U1.5 | length 42
  SIG 1 w0.25: J1.A9@49.726,52.89 49.726,53.558 49.963,53.795 J1.B4@49.963,54.533 49.938,54.558 v1@49.938,55.079 ; v2(51.025,50.275) v2@51.032,50.282 ; U1.5@51.032,51.273 U1.5@51.039,51.28 ; v1(52.322,52.091) 52.322,52.132 52.238,52.216 52.238,52.811 52.213,52.836 52.213,53.558 52.463,53.808 J1.B9@52.463,54.533 52.458,54.538 52.458,55.174 v1(52.453,55.18)
  SIG 1 w0.35: v2@51.032,50.282 U1.5@51.032,51.273
  SIG 2 w0.25: v1(49.843,55.214) 49.843,55.255 49.928,55.34 49.928,55.401 50.219,55.692 51.941,55.692 v1(52.453,55.18)
  PWR w0.25: v1(52.322,52.091) 51.025,50.794 v2(51.025,50.275) 50.175,50.275 48.275,48.375 48.275,41.742 48.6,41.417 v2(48.6,39) 48.695,39 48.916,39.221 64.759,39.221 65.18,38.8 v2(65.275,38.8)
  other v2: 65.275,38.025
PDRESETA: C51A.1 R51A.1 U8A.44 | length 3.5
  SIG 1 w0.203: U8A.44@26.6,21.15 26.6,22.078 26.992,22.47 C51A.1@28.1,22.47 28.135,22.435 28.965,22.435 R51A.1@29,22.4
PDRESETB: C51B.1 R51B.1 U8B.44 | length 3.5
  SIG 1 w0.203: U8B.44@76.1,20.95 76.1,21.878 76.492,22.27 C51B.1@77.6,22.27 77.635,22.235 78.465,22.235 R51B.1@78.5,22.2
PDRESETC: C51C.1 R51C.1 U8C.44 | length 3.5
  SIG 1 w0.203: U8C.44@124.95,21.45 124.95,22.378 125.342,22.77 C51C.1@126.45,22.77 126.485,22.735 127.315,22.735 R51C.1@127.35,22.7
PDRESETD: C51D.1 R51D.1 U8D.44 | length 3.5
  SIG 1 w0.203: R51D.1@157.1,41.525 157.135,41.49 157.965,41.49 C51D.1@158,41.455 159.108,41.455 159.5,41.847 U8D.44@159.5,42.775